# Altium PCB PCB1.PcbDoc
Units mm, origin at the board's own origin, x right, y up, seen from the top; angles counter-clockwise.
Board outline 117.4 x 100.2 mm, 2 copper layers (Top Layer, Bottom Layer); 124 components, 85 nets, 358 pads, 79 vias.
Unrouted connection lines stored in the file: 1.
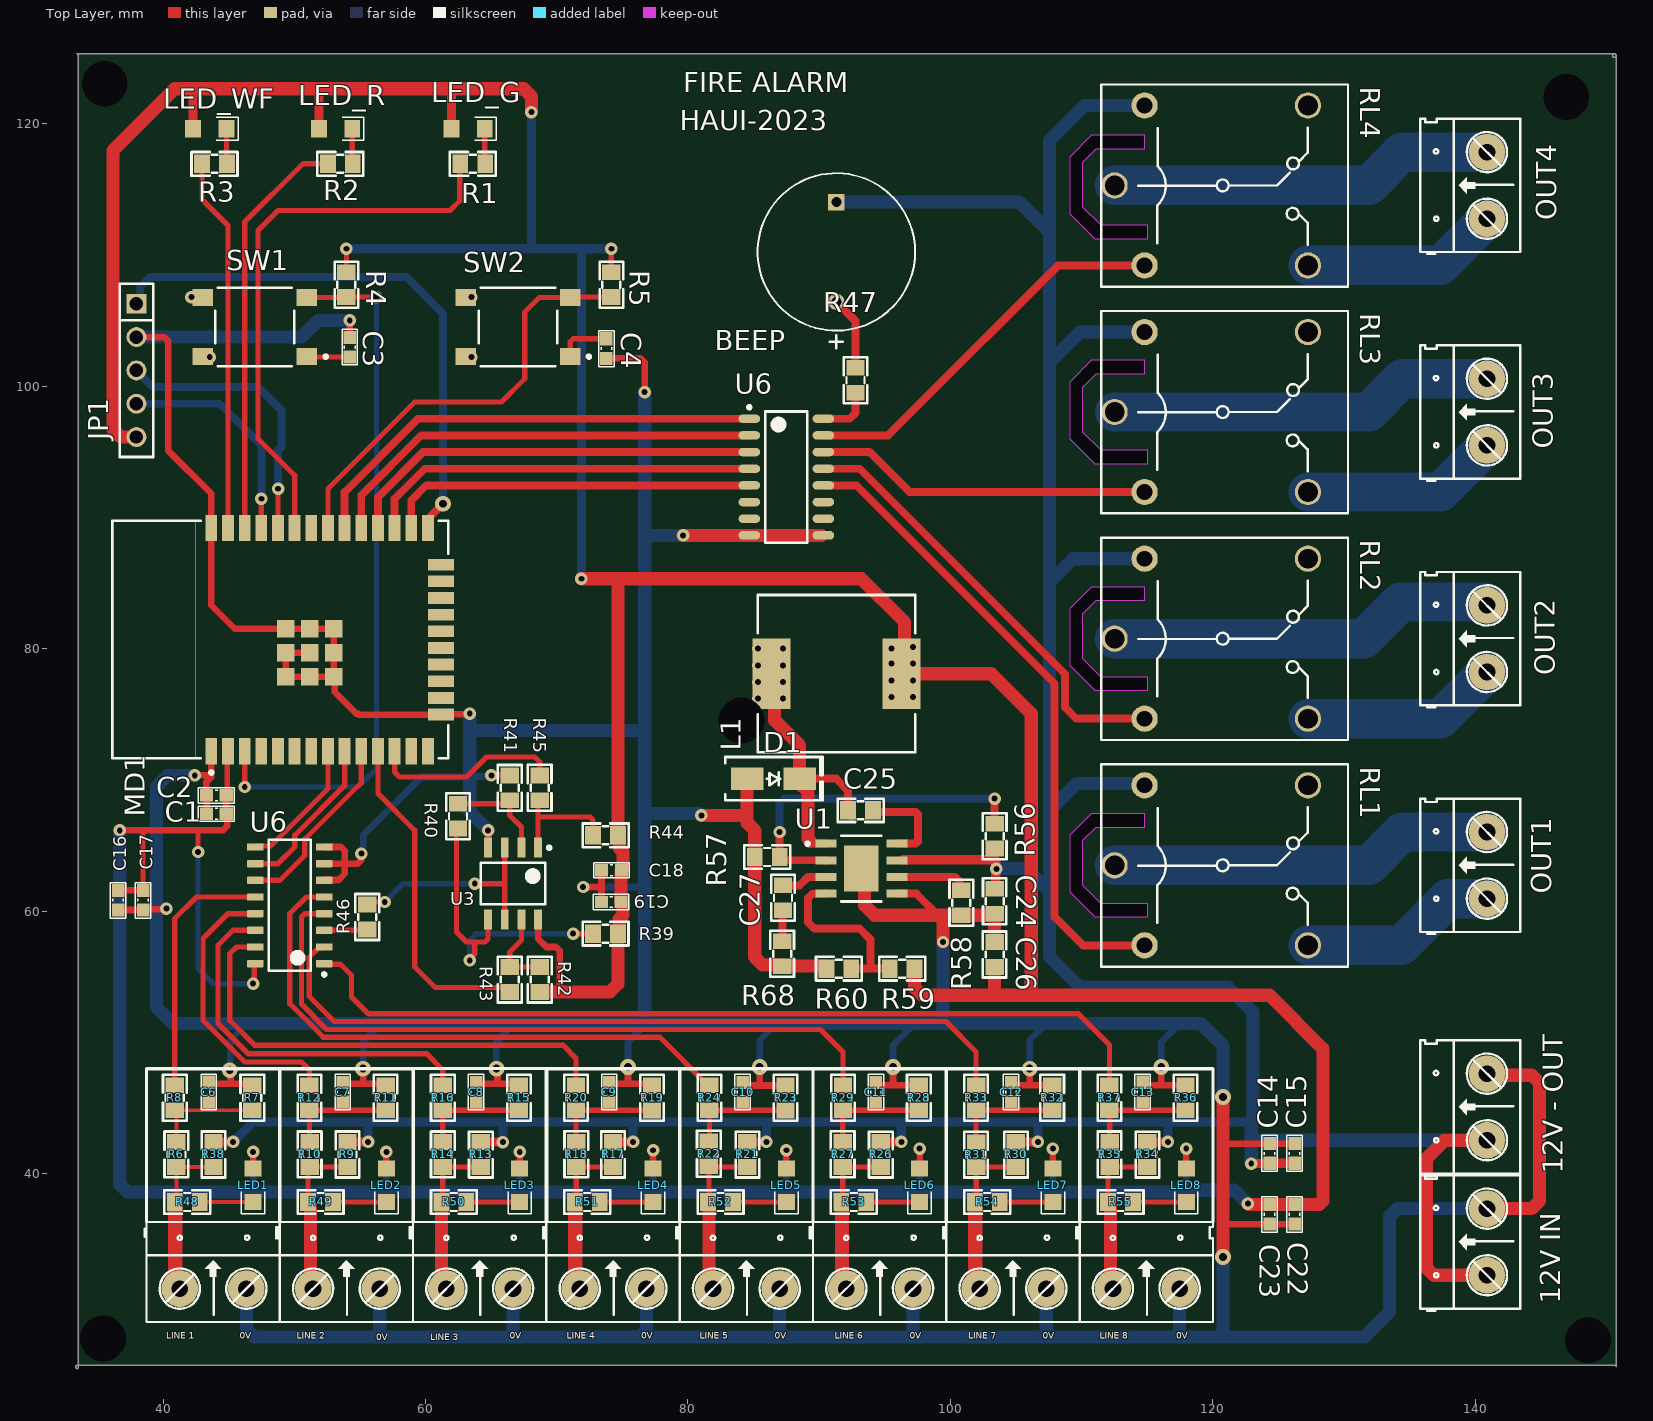
[diagram p0: Top Layer view]
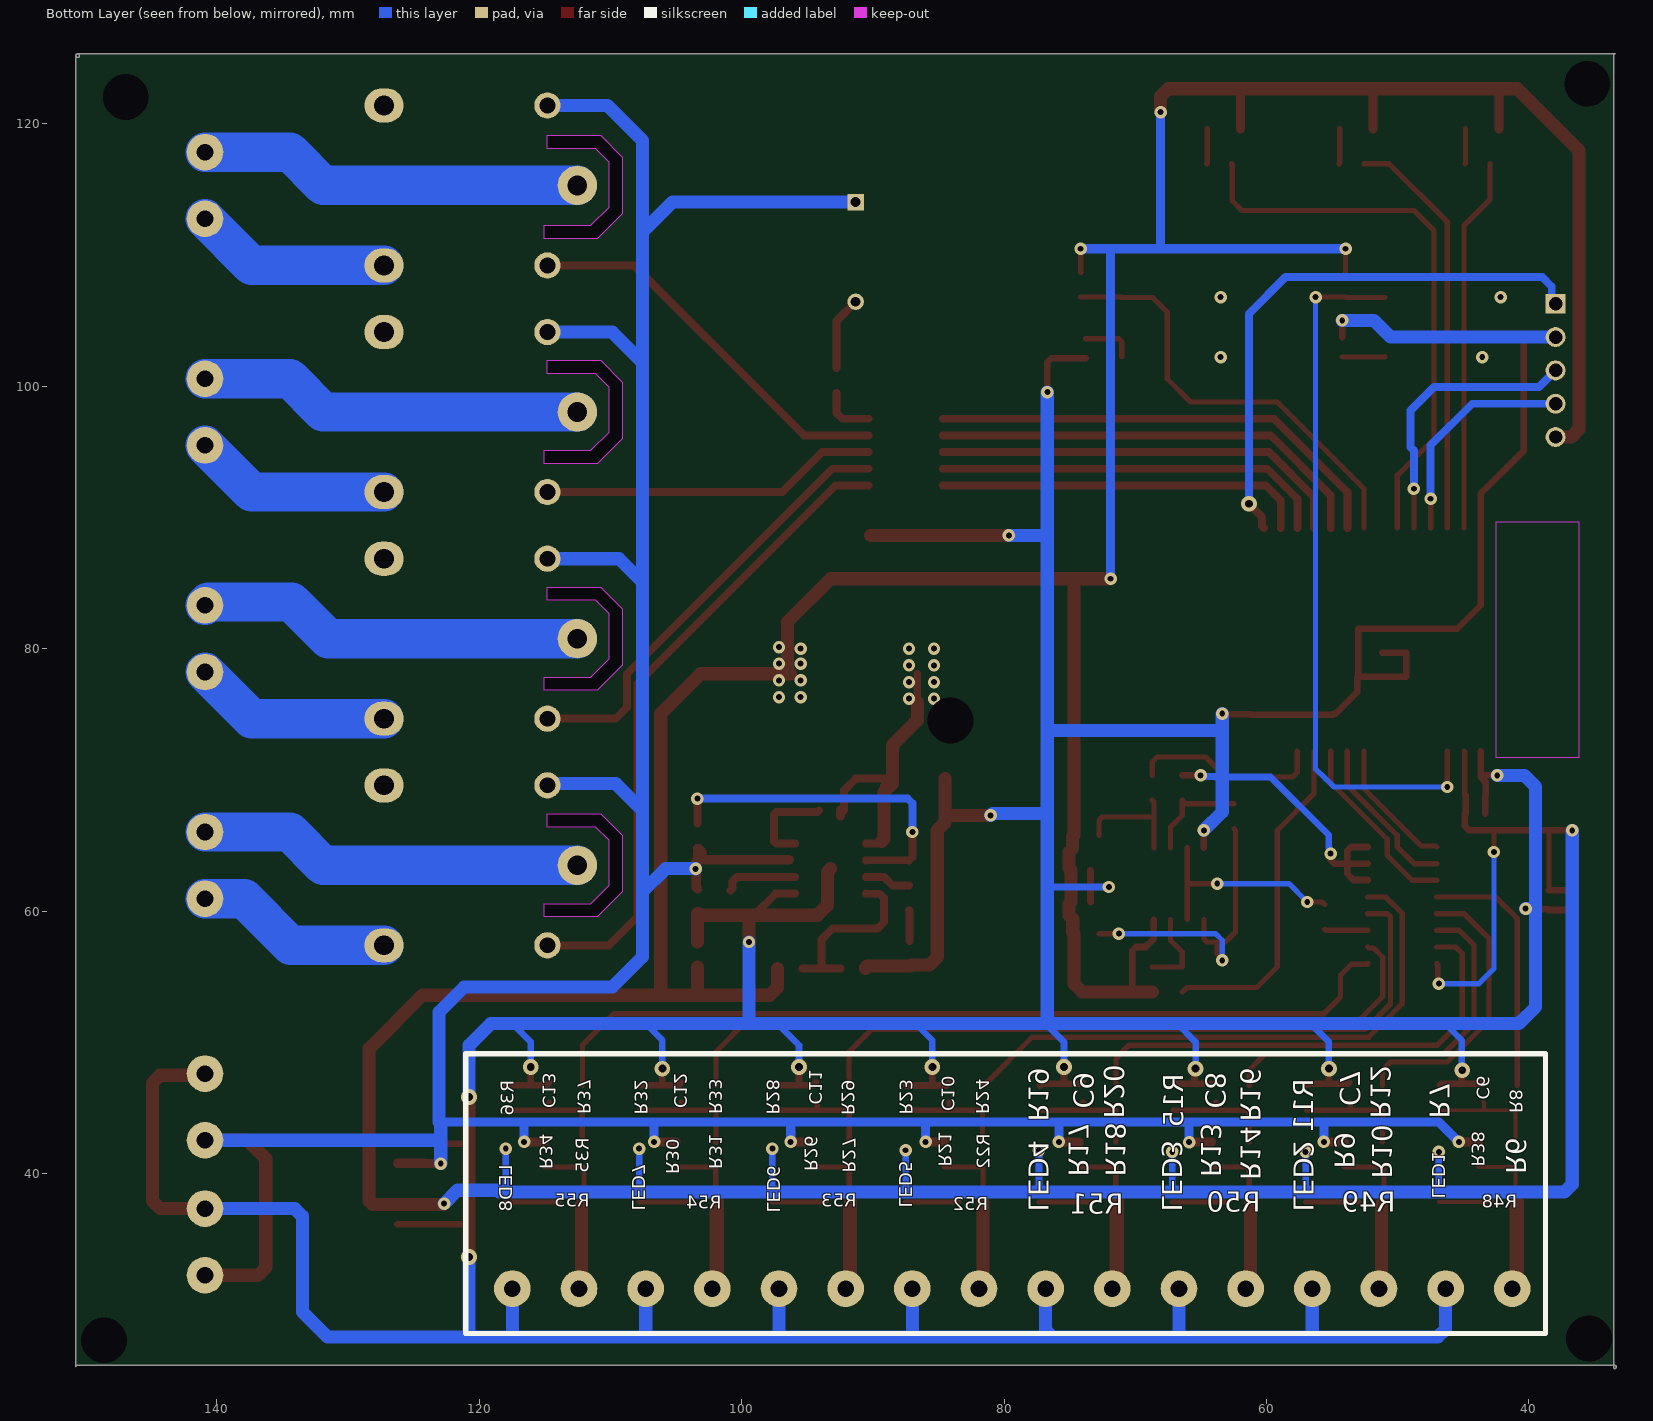
[diagram p1: Bottom Layer view, seen from below]
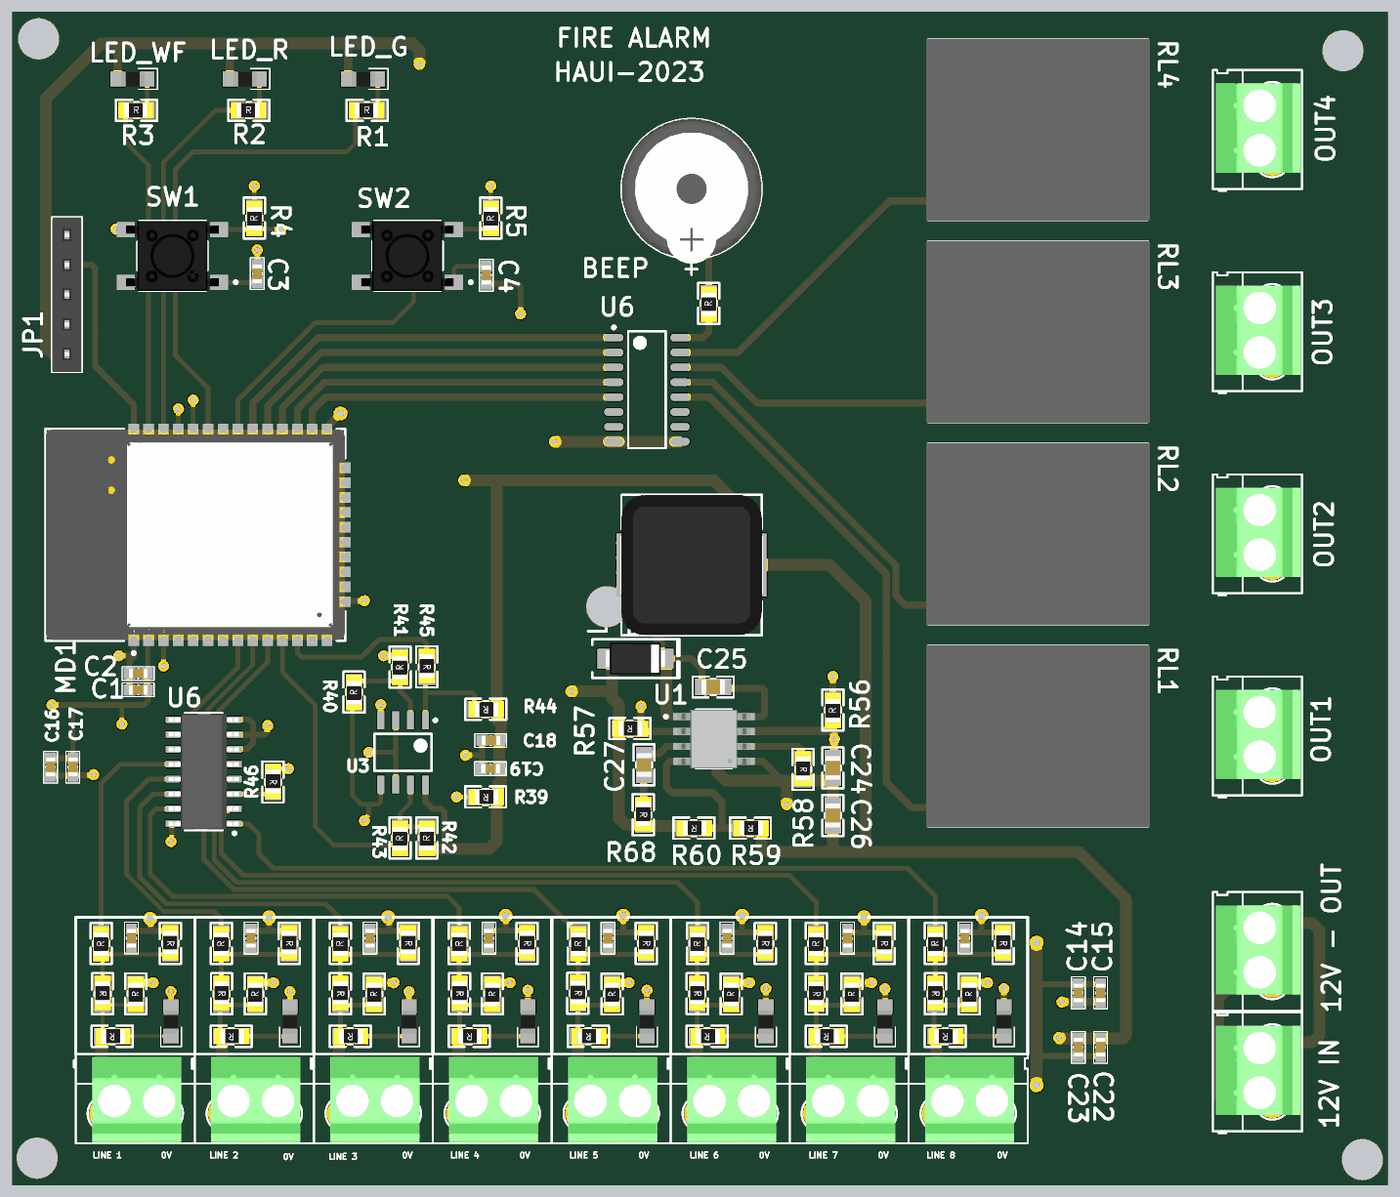
[diagram p2: 3D render of the assembled board from above, using the file's embedded part models]

## Layer stack, top to bottom
Top Solder: solder mask 0.0102, Solder Resist, Dk 3.5
Top Layer: signal copper 0.0356
Dielectric 1: dielectric 0.32, FR-4, Dk 4.8
Bottom Layer: signal copper 0.0356
Bottom Solder: solder mask 0.0102, Solder Resist, Dk 3.5

## Board outline
33.477,25.146 33.503,25.146 ccw(c33.401,25.222) 33.528,25.222 33.528,25.4 150.495,25.4 150.622,25.4 cw(c150.622,25.273) 150.749,25.273 150.749,125.222 cw(c150.622,125.222) 150.622,125.095 150.495,125.095 150.495,125.222 cw(c150.622,125.222) 150.622,125.349 cw(c150.622,125.222) 150.749,125.222 150.622,125.349 33.477,125.349 ccw(c33.477,125.222) 33.439,125.344 cw(c33.401,125.222) 33.528,125.222 33.528,125.095 33.528,25.4 33.477,25.4 ccw(c33.477,25.273)
cut-out: 114.808,119.126 110.744,119.126 109.093,117.475 109.093,113.157 110.998,111.252 115.062,111.252 115.062,112.268 111.506,112.268 110.109,113.665 110.109,117.094 111.125,118.11 114.808,118.11
cut-out: 114.808,101.981 110.744,101.981 109.093,100.33 109.093,96.012 110.998,94.107 115.062,94.107 115.062,95.123 111.506,95.123 110.109,96.52 110.109,99.949 111.125,100.965 114.808,100.965
cut-out: 114.808,84.709 110.744,84.709 109.093,83.058 109.093,78.74 110.998,76.835 115.062,76.835 115.062,77.851 111.506,77.851 110.109,79.248 110.109,82.677 111.125,83.693 114.808,83.693
cut-out: 114.808,67.437 110.744,67.437 109.093,65.786 109.093,61.468 110.998,59.563 115.062,59.563 115.062,60.579 111.506,60.579 110.109,61.976 110.109,65.405 111.125,66.421 114.808,66.421

## Design rules (kind name [scope] priority, off if disabled: settings)
BackDrilling [All] p1: maxstublength=0.381 usetopbackdrill=TRUE usebottombackdrill=TRUE holeoversize=0.025 holetolplus=0 holetolminus=0
Clearance [All] p1: gap=0.2 ignorepadtopadclearanceinfootprint=FALSE
HoleSize [All] p1: absolutevalues=TRUE maxlimit=2.54 minlimit=0.3 maxpercent=80.000 minpercent=20.000
PolygonConnect [All] p1: connectstyle=Relief reliefconductorwidth=0.254 reliefentries=4 polygonreliefangle="90 Angle" airgapwidth=0.254
RoutingVias [All] p1: holewidth=0.45 width=0.95 viastyle="Through Hole" minholewidth=0.45 minwidth=0.95 maxholewidth=0.6 maxwidth=1.2
SolderMaskExpansion [All] p1: expansion=0.102 istentingtop=FALSE
Width OUTPUT [InNetClass('OUTPUT')] p1: maxlimit=3 minlimit=1 preferedwidth=2
Width 12V [InNet('12V')] p2: maxlimit=1 minlimit=0.5 preferedwidth=0.7
Width 3.3V [InNet('3.3V')] p3: maxlimit=1 minlimit=0.254 preferedwidth=0.4
Width GND [InNet('GND')] p4: maxlimit=1 minlimit=0.254 preferedwidth=0.5
Width [All] p5: maxlimit=0.6 minlimit=0.3 preferedwidth=0.4
29 further rules are at their usual default settings.

## Classes and differential pairs
component class Power: C24 C25 C26 C27 D1 L1 R56 R57 R58 R59 R60 R68 U1
component class Connect_Input_output: C22 C23 LED1 LED2 LED3 LED4 LED5 LED6 LED7 LED8 "LINE 1" "LINE 2" "LINE 3" "LINE 4" "LINE 5" "LINE 6" "LINE 7" "LINE 8" R48 R49 R50 R51 R52 R53 R54 R55
component class Center: C1 C2 C3 C4 JP1 LED_G LED_R LED_WF MD1 R1 R2 R3 R4 R5 SW1 SW2
component class 16_Line_sensor: C6 C7 C8 C9 C10 C11 C12 C13 C14 C15 C16 C17 C18 C19 R6 R7 R8 R9 R10 R11 R12 R13 R14 R15 R16 R17 R18 R19 R20 R21 R22 R23 R24 R26 R27 R28 R29 R30 R31 R32 R33 R34 R35 R36 R37 R38 R39 R40 R41 R42 R43 R44 R45 R46 U3 U6
component class "4Line Output": "12V - OUT" "12V IN" BEEP OUT1 OUT2 OUT3 OUT4 R47 RL1 RL2 RL3 RL4 U6

## Components (designator, comment, footprint, x,y, rotation, side; value= is the part's Value field where it differs from the comment)
"12V - OUT" "CON 2 KF301" "Con 2 KF301 5.08" 140.9,42.545 r90 top
"12V IN" "CON 2 KF301" "Con 2 KF301 5.08" 140.9,32.258 r90 top
BEEP "MCKPX-G1203A-K4056" FP-MCKPX-G1203A-K4056-MFG 91.313,110.246 r270 top
C1 "104" "tu 0603" 44.069,67.437 r180 top
C2 "106" "tu 0603" 44.069,68.834 r180 top
C3 "104" "tu 0603" 54.229,102.985 r90 top
C4 "104" "tu 0603" 73.787,102.882 r270 top
C6 "104" "tu 0603" 43.481,46.216 r90 top
C7 "104" "tu 0603" 53.694,46.209 r90 top
C8 "104" "tu 0603" 63.854,46.209 r90 top
C9 "104" "tu 0603" 74.006,46.204 r90 top
C10 "104" "tu 0603" 84.174,46.204 r90 top
C11 "104" "tu 0603" 94.334,46.209 r90 top
C12 "104" "tu 0603" 104.633,46.209 r90 top
C13 "104" "tu 0603" 114.656,46.216 r90 top
C14 "104" "tu 0603" 124.333,41.541 r90 top
C15 "106" "tu 0603" 126.238,41.541 r90 top
C16 "104" "tu 0603" 36.576,60.845 r270 top
C17 "106" "tu 0603" 38.481,60.845 r270 top
C18 "104" "tu 0603" 74.18,63.119 r180 top
C19 "106" "tu 0603" 74.156,60.706 r180 top
C22 "104" "tu 0603" 126.238,36.908 r270 top
C23 "106" "tu 0603" 124.333,36.908 r270 top
C24 "106" "tu 0805" 103.381,60.771 r270 top
C25 "104" "tu 0805" 93.161,67.688 r180 top
C26 "226" "tu 0805" 103.375,56.704 r90 top
C27 "221" "tu 0805" 87.252,61.03 r270 top
D1 "SS34" "DIODE SMA" 86.519,70.104 r0 top
JP1 "code" "JP 1x5 CT" 37.973,106.299 r270 top
L1 "10uH" SUMI-CDRH127_V 91.316,78.105 r90 top
LED1 "LED" LED-0805 46.863,39.116 r270 top value="LED 3 ly Single Colour"
LED2 "LED" LED-0805 57.023,39.116 r270 top value="LED 3 ly Single Colour"
LED3 "LED" LED-0805 67.183,39.116 r270 top value="LED 3 ly Single Colour"
LED4 "LED" LED-0805 77.343,39.116 r270 top value="LED 3 ly Single Colour"
LED5 "LED" LED-0805 87.503,39.116 r270 top value="LED 3 ly Single Colour"
LED6 "LED" LED-0805 97.663,39.116 r270 top value="LED 3 ly Single Colour"
LED7 "LED" LED-0805 107.823,39.116 r270 top value="LED 3 ly Single Colour"
LED8 "LED" LED-0805 117.983,39.116 r270 top value="LED 3 ly Single Colour"
LED_G "LED_G" LED-0805 63.246,119.634 r0 top value="LED 3 ly Single Colour"
LED_R "LED" LED-0805 53.149,119.634 r0 top value="LED 3 ly Single Colour"
LED_WF "LED" LED-0805 43.561,119.634 r0 top value="LED 3 ly Single Colour"
"LINE 1" "CON 2 KF301" "Con 2 KF301 5.08" 41.275,31.242 r0 top
"LINE 2" "CON 2 KF301" "Con 2 KF301 5.08" 51.435,31.242 r0 top
"LINE 3" "CON 2 KF301" "Con 2 KF301 5.08" 61.595,31.242 r0 top
"LINE 4" "CON 2 KF301" "Con 2 KF301 5.08" 71.755,31.242 r0 top
"LINE 5" "CON 2 KF301" "Con 2 KF301 5.08" 81.915,31.242 r0 top
"LINE 6" "CON 2 KF301" "Con 2 KF301 5.08" 92.075,31.242 r0 top
"LINE 7" "CON 2 KF301" "Con 2 KF301 5.08" 102.235,31.242 r0 top
"LINE 8" "CON 2 KF301" "Con 2 KF301 5.08" 112.395,31.242 r0 top
MD1 "ESP32-WROOM-32" FP-ESP32-WROOM-32-MFG 48.941,80.699 r90 top
OUT1 "CON 2 KF301" "Con 2 KF301 5.08" 140.9,60.96 r90 top
OUT2 "CON 2 KF301" "Con 2 KF301 5.08" 140.9,78.232 r90 top
OUT3 "CON 2 KF301" "Con 2 KF301 5.08" 140.9,95.504 r90 top
OUT4 "CON 2 KF301" "Con 2 KF301 5.08" 140.9,112.776 r90 top
R1 "220" "tro smd 0805" 63.606,117.028 r0 top
R2 "220" "tro smd 0805" 53.509,117.028 r0 top
R3 "220" "tro smd 0805" 43.921,117.028 r0 top
R4 "1R" "tro smd 0805" 53.914,107.753 r90 top
R5 "1R" "tro smd 0805" 74.107,107.753 r90 top
R6 "100K" "tro smd 0805" 41.082,41.467 r270 top
R7 "33K" "tro smd 0805" 46.865,45.782 r270 top
R8 "10K" "tro smd 0805" 40.833,45.782 r90 top
R9 "1K" "tro smd 0805" 53.997,41.464 r90 top
R10 "100K" "tro smd 0805" 51.242,41.467 r270 top
R11 "33K" "tro smd 0805" 57.025,45.782 r270 top
R12 "10K" "tro smd 0805" 51.097,45.782 r90 top
R13 "1K" "tro smd 0805" 64.157,41.459 r90 top
R14 "100K" "tro smd 0805" 61.384,41.467 r270 top
R15 "33K" "tro smd 0805" 67.185,45.782 r270 top
R16 "10K" "tro smd 0805" 61.257,45.782 r90 top
R17 "1K" "tro smd 0805" 74.234,41.464 r90 top
R18 "100K" "tro smd 0805" 71.562,41.472 r270 top
R19 "33K" "tro smd 0805" 77.328,45.777 r270 top
R20 "10K" "tro smd 0805" 71.417,45.777 r90 top
R21 "1K" "tro smd 0805" 84.477,41.459 r90 top
R22 "100K" "tro smd 0805" 81.661,41.529 r270 top
R23 "33K" "tro smd 0805" 87.505,45.777 r270 top
R24 "10K" "tro smd 0805" 81.577,45.777 r90 top
R26 "1K" "tro smd 0805" 94.637,41.459 r90 top
R27 "100K" "tro smd 0805" 91.864,41.472 r270 top
R28 "33K" "tro smd 0805" 97.665,45.782 r270 top
R29 "10K" "tro smd 0805" 91.76,45.782 r90 top
R30 "1K" "tro smd 0805" 104.936,41.459 r90 top
R31 "100K" "tro smd 0805" 102.029,41.459 r270 top
R32 "33K" "tro smd 0805" 107.825,45.782 r270 top
R33 "10K" "tro smd 0805" 101.902,45.782 r90 top
R34 "1K" "tro smd 0805" 114.96,41.459 r90 top
R35 "100K" "tro smd 0805" 112.202,41.467 r270 top
R36 "33K" "tro smd 0805" 117.985,45.788 r270 top
R37 "10K" "tro smd 0805" 112.062,45.788 r90 top
R38 "1K" "tro smd 0805" 43.785,41.464 r90 top
R39 "1k" "tro smd 0805" 73.725,58.232 r180 top
R40 "2.2k" "tro smd 0805" 62.423,67.245 r90 top
R41 "2.2k" "tro smd 0805" 66.36,69.399 r90 top
R42 "4.7k" "tro smd 0805" 68.646,54.794 r90 top
R43 "1k" "tro smd 0805" 66.36,54.794 r90 top
R44 "4.7k" "tro smd 0805" 73.73,65.725 r180 top
R45 "1k" "tro smd 0805" 68.768,69.407 r270 top
R46 "1k" "tro smd 0805" 55.626,59.563 r270 top
R47 "2.2k" "tro smd 0805" 92.71,100.457 r90 top
R48 "2.2k" "tro smd 0805" 41.848,37.785 r180 top
R49 "2.2k" "tro smd 0805" 52.008,37.785 r180 top
R50 "2.2k" "tro smd 0805" 62.168,37.785 r180 top
R51 "2.2k" "tro smd 0805" 72.328,37.785 r180 top
R52 "2.2k" "tro smd 0805" 82.488,37.785 r180 top
R53 "2.2k" "tro smd 0805" 92.648,37.785 r180 top
R54 "2.2k" "tro smd 0805" 102.813,37.785 r180 top
R55 "2.2k" "tro smd 0805" 112.973,37.785 r180 top
R56 "100k" "tro smd 0805" 103.317,65.721 r90 top
R57 "24.9k" "tro smd 0805" 86.049,64.074 r180 top
R58 "200k" "tro smd 0805" 100.899,60.649 r270 top
R59 "124k" "tro smd 0805" 96.331,55.565 r180 top
R60 "40.2k" "tro smd 0805" 91.51,55.565 r180 top
R68 "68.1k" "tro smd 0805" 87.249,56.769 r270 top
RL1 "Relay" RL_SPDT_10A 112.522,63.5 r0 top value="Relay SPDT, 10A, 12V"
RL2 "Relay" RL_SPDT_10A 112.522,80.772 r0 top value="Relay SPDT, 10A, 12V"
RL3 "Relay" RL_SPDT_10A 112.522,98.044 r0 top value="Relay SPDT, 10A, 12V"
RL4 "Relay" RL_SPDT_10A 112.522,115.316 r0 top value="Relay SPDT, 10A, 12V"
SW1 "PTS645SM43SMTR92LFS" FP-PTS645SM43SMTR92LFS-MFG 46.99,104.521 r180 top
SW2 "PTS645SM43SMTR92LFS" FP-PTS645SM43SMTR92LFS-MFG 67.056,104.521 r180 top
U1 "MP1584EN-LF-Z" FP-MP1584EN-LF-Z-MFG 93.218,63.246 r0 top
U3 "LM393DR2G" ONSC-SOIC-8-751-07_V 66.675,62.103 r270 top
U6 "CD4051BM96" D0016A_L 49.657,60.452 r180 top
U6 "ULN2003D1013TR" STM-SO-16_M 87.503,93.091 r0 top

## Footprints (in the part's own frame and the unit in brackets; to place one, negate y for a bottom-side part, rotate by r counter-clockwise, add the part's x,y. Pads: shape width x height; smd on the part's side, far side on the other; paste and mask are expansions set on the pad)
"Con 2 KF301 5.08" [mil]
  round 110 hole 50: 1(0,0) 2(200,0)
  silkscreen extent -106,-100 300,200, body extent -45,-97 255,190, height 335
D0016A_L [mm] "SOIC, 16-Leads, Body 10x4mm, Pitch 1.27mm, IPC High Density"
  rrect18% 1.25x0.55 smd: 1(-2.625,4.445) 2(-2.625,3.175) 3(-2.625,1.905) 4(-2.625,0.635) 5(-2.625,-0.635) 6(-2.625,-1.905) 7(-2.625,-3.175) 8(-2.625,-4.445) 9(2.625,-4.445) 10(2.625,-3.175) 11(2.625,-1.905) 12(2.625,-0.635) 13(2.625,0.635) 14(2.625,1.905) 15(2.625,3.175) 16(2.625,4.445)
  silkscreen extent -2.75,-5 1.6,5.39, body extent -3,-4.95 3,4.95, height 1.59
"DIODE SMA" [mm] "SMA"
  rect 2.5x1.7 smd: 1(-2,0) 2(2,0)
  silkscreen extent -3.68,-1.65 3.75,1.65, body extent -2.6,-1.37 2.6,1.37, height 2.4
FP-ESP32-WROOM-32-MFG [mm]
  rect 2x0.9 smd paste+0 mask+0: 1(-8.5,5.26) 2(-8.5,3.99) 3(-8.5,2.72) 4(-8.5,1.45) 5(-8.5,0.18) 6(-8.5,-1.09) 7(-8.5,-2.36) 8(-8.5,-3.63) 9(-8.5,-4.9) 10(-8.5,-6.17) 11(-8.5,-7.44) 12(-8.5,-8.71) 13(-8.5,-9.98) 14(-8.5,-11.25) 25(8.5,-11.25) 26(8.5,-9.98) 27(8.5,-8.71) 28(8.5,-7.44) 29(8.5,-6.17) 30(8.5,-4.9) 31(8.5,-3.63) 32(8.5,-2.36) 33(8.5,-1.09) 34(8.5,0.18) 35(8.5,1.45) 36(8.5,2.72) 37(8.5,3.99) 38(8.5,5.26)
  rect 0.9x2 smd paste+0 mask+0: 15(-5.715,-12.25) 16(-4.445,-12.25) 17(-3.175,-12.25) 18(-1.905,-12.25) 19(-0.635,-12.25) 20(0.635,-12.25) 21(1.905,-12.25) 22(3.175,-12.25) 23(4.445,-12.25) 24(5.715,-12.25)
  rect 1.33x1.33 smd paste+0 mask+0: 39(-2.835,-2.24) 39(-2.835,-0.405) 39(-2.835,-4.075) 39(-1,-0.405) 39(-1,-4.075) 39(-1,-2.24) 39(0.835,-0.405) 39(0.835,-4.075) 39(0.835,-2.24)
  Keep-Out Layer region: -9,6.45 9,6.45 9,12.75 -9,12.75
  Keep-Out Layer region: -9,6.45 9,6.45 9,12.75 -9,12.75
  silkscreen extent -10.25,-12.8 9.05,12.8, body extent -9.6,-13.35 9.6,12.9, height 0.25
FP-MCKPX-G1203A-K4056-MFG [mm]
  rect 1.25x1.25 hole 0.75 paste-1000 mask+0: 1(-3.8,0)
  round 1.25 hole 0.75 paste-1000 mask+0: 2(3.8,0)
  silkscreen extent -6,-6 7.35,6, body extent -6.1,-6.1 6.1,6.1, height 0.25
FP-MP1584EN-LF-Z-MFG [mm]
  rect 1.6x0.61 smd paste+0 mask+0: 1(-2.7,1.905) 2(-2.7,0.635) 3(-2.7,-0.635) 4(-2.7,-1.905) 5(2.7,-1.905) 6(2.7,-0.635) 7(2.7,0.635) 8(2.7,1.905)
  rect 2.62x3.51 smd paste+0 mask+0: 9(0,0)
  silkscreen extent -4.22,-2.5 1.53,2.5, body extent -3.6,-2.6 3.6,2.6, height 0.25
FP-PTS645SM43SMTR92LFS-MFG [mm]
  rect 1.55x1.3 smd paste+0 mask+0: 1(-3.975,2.25) 2(3.975,2.25) 3(-3.975,-2.25) 4(3.975,-2.25)
  silkscreen extent -5.53,-3 3,3, body extent -4.85,-3.1 4.85,3.1, height 0.25
"JP 1x5 CT" [mm]
  rect 1.52x1.52 hole 1.02: 1(0,0)
  round 1.52 hole 1.02: 2(2.54,0) 3(5.08,0) 4(7.62,0) 5(10.16,0)
  silkscreen extent -1.52,-1.27 11.68,1.27, body extent -1.52,-1.25 11.68,1.25, height 8.51
LED-0805 [mm] "Resistor SMD 80x50mil"
  rect 1.2x1.3 smd: 1(-1.27,0) 2(1.27,0)
  silkscreen extent 0.5,-0.89 2.16,0.89, body extent -0.97,-0.64 1.03,0.62, height 0.58
ONSC-SOIC-8-751-07_V [mm] "SOIC, 8-Leads, Body 4.9x3.9mm, Pitch 1.27mm"
  rect 1.52x0.6 smd: 1(-2.74,1.905) 2(-2.74,0.635) 3(-2.74,-0.635) 4(-2.74,-1.905) 5(2.74,-1.905) 6(2.74,-0.635) 7(2.74,0.635) 8(2.74,1.905)
  silkscreen extent -2.86,-2.45 1.58,2.88, body extent -1.95,-2.45 1.95,2.45, height 1.75
RL_SPDT_10A [mm] "Relay SPDT, 5 pin, 10A,W 650mil, L 800mil, H 800mil"
  round 2 / inner round 3 / far side round 3 hole 1.5: 1(0,0)
  round 2 / inner round 3 / far side oval 3x2.6 hole 1.5: 2(14.732,6.096) 3(14.732,-6.096)
  round 2 hole 1.2: 4(2.286,-6.096) 5(2.286,6.096)
  silkscreen extent -1.02,-7.72 17.78,7.7, body extent -1.17,-7.78 17.93,7.72, height 15.2
STM-SO-16_M [mm] "SOIC, 16-Leads, Body 10x4mm, Pitch 1.27mm, IPC Low Density"
  oval 1.65x0.65 smd: 1(-2.825,4.445) 2(-2.825,3.175) 3(-2.825,1.905) 4(-2.825,0.635) 5(-2.825,-0.635) 6(-2.825,-1.905) 7(-2.825,-3.175) 8(-2.825,-4.445) 9(2.825,-4.445) 10(2.825,-3.175) 11(2.825,-1.905) 12(2.825,-0.635) 13(2.825,0.635) 14(2.825,1.905) 15(2.825,3.175) 16(2.825,4.445)
  silkscreen extent -2.95,-5 1.6,5.44, body extent -2,-5 2,5, height 1.75
SUMI-CDRH127_V [mm] "SMD, 2-Leads, Body 12x12mm"
  rect 5.4x2.9 smd: 1(0,4.95) 2(0,-4.95)
  silkscreen extent -6,-6 6,6, body extent -6,-6.1 6,6.1, height 8.4
"tro smd 0805" [mm]
  rect 1.2x1.4 smd: 1(-0.946,-0.061) 2(0.954,-0.061)
  silkscreen extent -1.75,-0.97 1.75,0.84, body extent -1.56,-0.76 1.44,0.64, height 0.53
"tu 0603" [mm] "Chip Capacitor, 2-Leads, Body 1,60x0,80mm, IPC Medium Density"
  rect 1x0.95 smd mask+0.076: 1(-0.75,0) 2(0.75,0)
  silkscreen extent -1.35,-0.58 1.37,0.58, body extent -0.8,-0.4 0.8,0.4, height 0.9
"tu 0805" [mm] "Compoment SMD 80x50mil"
  rect 1.2x1.4 smd: 1(-0.946,-0.003) 2(0.954,-0.003)
  silkscreen extent -1.75,-0.89 1.75,0.89, body extent -1.01,-0.64 1.01,0.63, height 0.61

## Part data
"12V - OUT" "12V IN" "LINE 1" "LINE 2" "LINE 3" "LINE 4" "LINE 5" "LINE 6" "LINE 7" "LINE 8" OUT1 OUT2 OUT3 OUT4: "Cắm", Chung_Loai=Cắm, Don_Vi=Con, Ma_Hang=MH000987, Ten_Linh_Kien="CON 2 KF301-2P 5.08MM Xanh Dương"
BEEP: library part CMP-12433-000001-1, "MAGNETIC BUZZER AND TRANSDUCER - More Details", Current=30mA, Frequency=2300Hz, Manufacturer="Multicomp Pro", Max Supply Voltage=5V, Min Supply Voltage=2V, Operating Supply Voltage=3V, Package=0, Temperature="-20°C to +70°C", Temperature Range High=+70°C, Temperature Range Low=-20°C, Automotive=No, Category=Speak, ComponentLink2Description=Datasheet, ComponentLink2URL=http://www.farnell.com/datasheets/1498149.pdf?_ga=2.17855225.1157923166.1572356775-536200964.1569240579, Device Class L1=Electromechanical, Device Class L2="Audio Products", Device Class L3=Buzzers, Height=9.5mm, Lead Free=Yes, Manufacturer Part Number=MCKPX-G1203A-K4056, Octopart=https://octopart.com/mckpx-g1203a-k4056-multicomp-12157154, RoHS=TRUE, Standoff Height=0.5mm
C1 C3 C4 C6 C7 C8 C9 C10 C11 C12 C13 C14 C16 C18 C22: library part "Tu 0603 104 50V 10%", "Dán", Chung_Loai=Dán, Don_Vi=Con, Ma_Hang=MH004568, So_Chan=2, Ten_Linh_Kien="Tụ 0603 104-100nF 10% 50V"
C2 C15 C17 C19 C23: library part "Tu 0603 106 16V 20%", "Dán", Chung_Loai=Dán, Don_Vi=Con, Ma_Hang=MH004848, So_Chan=2, Ten_Linh_Kien="Tụ 0603-10uF 20% 16V"
C24: library part "Tu 0805 106 16V 10%", "Dán", Chung_Loai=Dán, Don_Vi=Con, Ma_Hang=MH004553, So_Chan=2, Ten_Linh_Kien="Tụ 0805 106-10uF 10% 16V"
C25 C26: library part "Tu 0805 104 50V 10%", "Dán", Chung_Loai=Dán, Don_Vi=Con, Ma_Hang=MH004551, So_Chan=2, Ten_Linh_Kien="Tụ 0805 104-100nF 10% 50V"
C27: library part "Tu 0805 222 50V 10%", "Dán", Chung_Loai=Dán, Don_Vi=Con, Ma_Hang=MH004557, So_Chan=2, Ten_Linh_Kien="Tụ 0805 222-2.2nF 10% 50V"
D1: library part "Diode SS34 ( 1N5822 )", "Dán", Chung_Loai=Dán, Don_Vi=Con, Ma_Hang=MH002104, Ten_Linh_Kien="Diode SS34 3A 40V SMA ( 1N5822 SS34A)"
JP1: library part "JP 1x5 2.54 Cai Thang", "Cắm", Chung_Loai=Cắm, Don_Vi=Con, Ma_Hang=MH004006, Ten_Linh_Kien="Jump Đơn Cái 2.54MM 1x20P Thẳng"
L1: library part CMP-2000-06084-1, "Power Inductor, 10 uH, +/- 20%, -40 to 100 degC, 2-Pin SMD, RoHS, Tape and Reel", Current - Saturation=-, Current Rating=5.4A, DC Resistance (DCR)=21.6mOhmMax, Frequency - Test=1kHz, Inductance=10µH, Manufacturer=Sumida, Operating Temperature=-40°C~100°C, Package / Case=Nonstandard, Package Description="2-Pin Surface Mount Device, Body 12 x 12 mm", Package Reference=CDRH127, Standard Package=1, Tolerance=±20%, Catalog Drawings=CDRH127SeriesFrontCDRH127SeriesSideCDRH127SeriesBottom, Category=Inductors,Coils,Chokes, Datasheet URL=http://products.sumida.com/products/pdf/CDRH127.pdf, Datasheet Version=01/2014, Family=FixedInductors, Frequency - Self Resonant=-, Height - Seated (Max)="0.315\"(8.00mm)", Manufacturer URL=http://www.sumida.com/, Material - Core=-, Mounting Technology=SurfaceMount, Mounting Type=SurfaceMount, Online Catalog=CDRHSeries, Other Names=308-1457-1, Packaging=CutTape(CT), Product Training Modules=PowerInductorBasics, Q @ Freq=-, Ratings=-, Series=CDRH127, Shielding=Shielded, Size / Dimension="0.472\"Lx0.472\"W(12.00mmx12.00mm)", Type=-
LED1 LED2 LED3 LED4 LED5 LED6 LED7 LED8 LED_R LED_WF: "LED Single colour Green and Red"
LED_G: library part LED, "LED Single colour Green and Red"
MD1: library part CMP-194065-000008-1, "RX TXRX MOD WIFI SURFACE MOUNT", Case/Package=SMD/SMT, Frequency=2.5GHz, Max Operating Temperature=85°C, Min Operating Temperature=-40°C, Operating Supply Voltage=3.6V, Package Quantity=550, Data Rate=150Mbps, Mount="Surface Mount", Packaging="Cut Tape", Sensitivity=-98dBm, Weight=0.088185oz
R1 R2 R3 R4 R5: library part "Tro 0805 1% 1R", "Dán", Chung_Loai=Dán, Don_Vi=Con, Ma_Hang=MH004177, So_Chan=2, Ten_Linh_Kien="Trở 0805 1% 1R"
R6 R7 R8 R9 R10 R11 R12 R13 R14 R15 R16 R17 R18 R19 R20 R21 R22 R23 R24 R26 R27 R28 R29 R30 R31 R32 R33 R34 R35 R36 R37 R38 R39 R40 R41 R42 R43 R44 R45 R46 R47 R48 R49 R50 R51 R52 R53 R54 R55 R56 R57 R58 R59 R60 R68: library part "Tro 0805 1% 2k", "Dán", Chung_Loai=Dán, Don_Vi=Con, Ma_Hang=MH005471, So_Chan=2, Ten_Linh_Kien="Trở 0805 1% 2k"
RL1 RL2 RL3 RL4: library part "Relay 1", "Relay SPDT 5 Pin"
SW1 SW2: library part CMP-2000-05160-2, "SWITCH TACTILE SPST-NO 0.05A 12V", Case/Package=SMD/SMT, Color=Black, Contact Resistance=100mR, Current Rating=50mA, Max Operating Temperature=60°C, Max Voltage Rating (DC)=12V, Min Operating Temperature=-20°C, Operating Force=160gf, Package Quantity=1, Actuator Length=0.85mm, Actuator Material=Nylon, Actuator Type=Standard, Contact Material=Silver, Contact Plating=Silver, Depth=9mm, Illumination Type=Non-Illuminated, Lead Free="Lead Free", Length=6mm, Max Current Rating=50mA, Mechanical Life=100000Cycles, Mount="Surface Mount", Orientation=Straight, Packaging="Tape and Reel", REACH SVHC="No SVHC", Switch Function=Off-Mom, Termination="Gull Wing", Throw Configuration=SPST, Voltage Rating (DC)=12V
U1: library part CMP-57379-000006-1, "IC REG BUCK ADJ 3A", Ambient Temperature Range High=+85°C, Ambient Temperature Range Low=-20°C, Manufacturer="Monolithic Power Systems", Max Junction Temp=+125°C, Max Power Dissipation=2.5W, Max Supply Voltage=28V, Min Supply Voltage=4.5V, Nominal Supply Current=100uA, Output Current=3A, Output Voltage=0.8-25V, Switching Frequency=100-1500kHz, Temperature="-20°C to +125°C", Automotive=No, Category=IC, ComponentLink2Description=Datasheet, ComponentLink2URL=https://www.monolithicpower.com/en/documentview/productdocument/index/doc_url/L01QMTU4NF9yMS4wLnBkZg%3D%3D/release_date/MjAwOS0wNC0wOSAwMDowMDowMA%3D%3D/, Device Class L1="Integrated Circuits (ICs)", Device Class L2="Power Management ICs", Device Class L3="Voltage Regulators - Switching", Digikey Description="IC REG BUCK ADJ 3A", Height=1.7mm, Ipc Land Pattern Name=SOIC127P600X150-8, Lead Free=Yes, Manufacturer Part Number=MP1584EN-LF-Z, Number Of Outputs=1, Octopart=https://octopart.com/mp1584en-lf-z-monolithic+power+systems-18629680, Output Type=AdjustableProgrammable, Package=MP1584EN-LF-Z, RoHS=TRUE, Standoff Height=0mm, Switching Topology=Buck, Temperature Range High=+125°C, Temperature Range Low=-20°C
U3: library part CMP-1305-00048-1, "Low Offset Voltage Dual Comparators, 2 to 36 V, 0 to 70 degC, 8-Pin SOIC, Pb-Free, Tape and Reel", Manufacturer="On Semiconductor", ComponentLink1Description="Manufacturer URL", ComponentLink1URL=http://www.onsemi.com/, ComponentLink2Description=Datasheet, ComponentLink2URL=http://www.onsemi.com/pub_link/Collateral/LM393-D.PDF, ComponentLink3Description="Package Specification", ComponentLink3URL=http://www.onsemi.com/pub_link/Collateral/751-07.PDF, DatasheetVersion="Rev. 25", ICC Typ (mA)=0.4, IO Typ (mA)=16, Mounting Technology="Surface Mount", PackageDescription="8-Pin Small Outline Integrated Circuit, Body 4.9 x 3.9 mm, Pitch 1.27 mm", PackageReference=SOIC-8-751-07, PackageVersion="Rev. AK, 02/2011", Packing="Tape and Reel", PartNumber=LM393DR2G, RoHS=TRUE, VCC Max (V)=36, VCC Min (V)=2
U6: library part CMP-1575-00045-4, "CMOS Single 8-Channel Analog Multiplexer/Demultiplexer with Logic-Level Conversion, D0016A, LARGE T&R", Generic Part Number=CD4051B, Manufacturer="Texas Instruments", Operating Temperature Range(C)="-55 to 125", Rating=Military, Bandwidth(Max)(MHz)=20, Code_JEDEC="MS-012 variation AC", Configuration="1 X 1：8 MUX", Crosstalk=Yes, DatasheetVersion=SCHS047G, ICC(Typ)(mA)=0.00008, Output Drive (IOL/IOH)(Max)(mA)=1, Output Type=CMOS, PackageReference=D0016A, PackageVersion=http://www.ti.com/lit/ml/mpds178g/mpds178g.pdf, Ron(Max)(Ohms)=240, Ron(Typ)(Ohms)=125, VCC(Max)(V)=18, VCC(Min)(V)=5
U6: library part CMP-2000-05374-1, "Seven NPN Darlington Array Transistor, 50 V, 500 mA, -40 to 85 degC, 8-Pin SOIC, RoHS, Tape and Reel", Collector Emitter Voltage V(br)ceo=50V, DC Collector Current=500mA, DC Current Gain hFE=1000hFE, Manufacturer=STMicroelectronics, Operating Temperature Max=85degC, Package Description="16-Pin Small Outline Integrated Circuit, Body 9.9 x 3.9 mm, Pitch 1.27 mm", Package Reference=SO-16, Power Dissipation Pd=-, Transistor Case Style=SOIC, Automotive Qualification Standard=-, Datasheet URL=https://datasheet.ciiva.com/1193/1690348-1193460.pdf, Datasheet Version="Rev. 8, 06/2012", Manufacturer URL=http://www.st.com/, MSL=MSL1-Unlimited, No. of Pins=16Pins, Product Range=-, SVHC=NoSVHC(17-Dec-2015), Transistor Polarity=NPN

## Free pads (board coordinates)
  round 1.524 hole 3.5: 2(35.433,27.432) 2(35.56,123.063) 2(84.074,74.549) 2(146.939,122.047) 2(148.59,27.305)

## Via types
v1: diameter 0.95, hole 0.45, Top Layer to Bottom Layer, 68 vias
v2: diameter 1.2, hole 0.6, Top Layer to Bottom Layer, 11 vias

## Nets (pads, with @x,y where several pads share a name; then routed paths per layer and width w, separated by ;. In a path a pad name is that pad's centre, name@x,y a point inside that pad or via, vN(x,y) a via of type N, cw(c..) or ccw(c..) an arc to the next point about the centre after c; other vN are vias at no path point)
3.3V: C1.1 C2.1 C16.1 C17.1 C18.1 C19.1 C22.1 C23.1 C26.1 JP1.5 L1.2 LED1.1 LED2.1 LED3.1 LED4.1 LED5.1 LED6.1 LED7.1 LED8.1 LED_G.1 LED_R.1 LED_WF.1 MD1.2 R4.2 R5.2 R39.1 R42.1 R44.1 R59.1 U3.8 U6.16@47.032,56.007 | length 477.5
  Top Layer w0.4: C17.1 38.481,66.167 ; v1(42.672,64.516) 42.672,66.167 ; C2.1@44.885,68.9 44.885,72.133 MD1.2 ; v1(46.863,54.483) 46.948,54.568 46.948,55.932 47.023,56.007 U6.16@47.032,56.007 ; R4.2 v1(53.975,110.49) ; R5.2 v1(74.168,110.49)
  Top Layer w0.5: C16.1 C17.1 ; v1(36.703,66.167) 38.481,66.167 42.672,66.167 44.577,66.167 44.883,66.473 C1.1@44.883,67.437 ; C1.1 C2.1 ; LED1.1 v1(46.863,41.656) ; LED2.1 v1(57.023,41.656) ; LED3.1 v1(67.183,41.656) ; U3.8 68.58,57.912 69.215,57.277 69.938,57.277 70.231,56.984 70.231,54.244 70.157,54.17 ; C19.1@74.674,60.706 C18.1@74.674,63.119 ; LED4.1 v1(77.343,41.783) ; LED5.1 v1(87.503,41.783) ; LED6.1 v1(97.663,41.91) ; LED7.1 v1(107.823,41.91) ; LED8.1 v1(117.983,41.91)
  Top Layer w0.7: 42.164,122.682 42.291,122.555 LED_WF.1 ; 51.816,122.682 51.88,122.618 LED_R.1 ; 61.849,122.682 61.976,122.555 LED_G.1
  Top Layer w1: JP1.5 36.781,96.139 36.195,96.725 36.195,117.983 40.894,122.682 42.164,122.682 51.816,122.682 61.849,122.682 67.486,122.682 68.072,122.096 v1(68.072,120.904) ; R42.1 74.041,53.848 74.671,54.478 R39.1 74.771,58.393 74.771,59.404 75.057,59.69 75.057,60.555 C19.1 74.906,63.095 C18.1 75.057,63.246 75.057,64.516 74.776,64.797 74.776,65.686 R44.1 74.676,85.344 ; v1(71.882,85.344) 74.676,85.344 ; R59.1 97.277,54.18 97.863,53.594 103.505,53.594 ; C26.1 103.378,53.721 103.505,53.594 ; 106.172,53.98 106.172,75.057 103.124,78.105 L1.2 96.517,78.356 96.517,82.042 93.215,85.344 74.676,85.344 ; v1(122.682,37.719) 122.743,37.658 C23.1 C22.1 128.131,37.658 128.397,37.924 128.397,49.53 124.333,53.594 103.505,53.594
  Bottom Layer w0.4: v1(42.672,64.516) 42.672,55.626 43.815,54.483 v1(46.863,54.483)
  Bottom Layer w0.5: 46.863,38.608 v1(46.863,41.656) ; 57.023,38.608 v1(57.023,41.656) ; v1(67.183,41.656) 67.183,38.735 67.31,38.608 ; 77.343,38.608 v1(77.343,41.783) ; 87.503,38.608 v1(87.503,41.783) ; 97.663,38.608 v1(97.663,41.91) ; v1(107.823,41.91) 107.823,38.735 107.95,38.608 ; 117.856,38.608 117.983,38.735 v1(117.983,41.91)
  Bottom Layer w0.7: v1(53.975,110.49) 68.072,110.49 ; v1(68.072,120.904) 68.072,110.49 ; v1(71.882,85.344) 71.882,110.49 ; v1(74.168,110.49) 71.882,110.49 ; 68.072,110.49 71.882,110.49
  Bottom Layer w1: v1(36.703,66.167) 36.703,39.194 37.289,38.608 46.863,38.608 57.023,38.608 67.31,38.608 77.343,38.608 87.503,38.608 97.663,38.608 107.95,38.608 117.856,38.608 118.491,38.608 118.618,38.735 121.666,38.735 v1(122.682,37.719)
  other v1: 95.504,76.327 97.155,76.327 95.504,77.597 97.155,77.597 95.504,78.867 97.155,78.867 95.504,80.01 97.155,80.137
12V: "12V - OUT.1" "12V IN.1" BEEP.1 C14.1 C15.1 C24.1 R9.2 R13.2 R17.2 R21.2 R26.2 R30.2 R34.2 R38.2 R56.1 RL1.5 RL2.5 RL3.5 RL4.5 U1.7 | length 297.6
  Top Layer w0.7: R38.2 v1(45.339,42.418) ; R9.2 v1(55.626,42.418) ; R13.2 v1(65.908,42.413) ; R17.2 74.295,42.291 74.422,42.418 v1(75.819,42.418) ; R21.2 85.974,42.413 v1(85.979,42.418) ; R26.2 96.261,42.413 v1(96.266,42.418) ; U1.7@96.368,63.926 103.028,63.926 103.028,64.425 103.028,64.525 103.153,64.65 103.278,64.775 R56.1 ; C24.1 103.467,61.806 103.467,63.175 v1(103.514,63.222) 103.467,63.27 103.467,63.837 103.378,63.926 R56.1@103.378,64.425 ; R30.2 106.675,42.413 v1(106.68,42.418) ; R34.2 116.581,42.413 v1(116.586,42.418) ; v1(122.936,40.767) 122.948,40.779 124.208,40.779 124.22,40.791 C15.1
  Top Layer w1: 140.9,32.258 136.857,32.258 136.271,32.844 136.271,41.148 137.668,42.545 140.9,42.545
  Bottom Layer w0.7: v1(45.339,42.418) 46.863,43.942 55.626,43.942 ; v1(55.626,42.418) 55.626,43.942 ; v1(65.908,42.413) 65.908,43.82 65.786,43.942 ; v1(75.819,42.418) 75.819,43.942 ; v1(85.979,42.418) 85.979,43.815 85.852,43.942 ; v1(96.266,42.418) 96.266,43.942 ; v1(106.68,42.418) 106.68,43.815 106.553,43.942 ; RL1.5@114.681,69.723 RL1.5 ; v1(116.586,42.418) 116.586,43.942 ; 122.936,43.942 116.586,43.942 ; 55.626,43.942 65.786,43.942 ; 65.786,43.942 75.819,43.942 ; 75.819,43.942 85.852,43.942 ; 85.852,43.942 96.266,43.942 ; 96.266,43.942 106.553,43.942 ; 106.553,43.942 116.586,43.942
  Bottom Layer w1: BEEP.1 105.283,114.046 107.569,111.76 ; v1(103.514,63.222) 103.538,63.246 105.791,63.246 107.569,61.468 ; RL1.5@114.681,69.723 109.601,69.723 107.569,67.691 ; RL2.5 109.347,86.868 107.569,85.09 ; RL3.5 109.855,104.14 107.569,101.854 ; RL4.5 110.236,121.412 107.569,118.745 107.569,111.76 ; v1(122.936,40.767) 122.936,42.545 ; 122.936,43.942 122.936,42.545 ; 123.063,43.942 123.063,52.324 121.158,54.229 109.855,54.229 107.569,56.515 107.569,61.468 ; 140.9,42.545 122.936,42.545 ; 107.569,61.468 107.569,67.691 ; 107.569,67.691 107.569,85.09 ; 107.569,85.09 107.569,101.854 ; 107.569,101.854 107.569,111.76
BBB: MD1.30 U6.1@84.678,97.536 | length 35.9
  Top Layer w0.6: MD1.30 53.841,91.941 59.436,97.536 U6.1@84.678,97.536
BEEP: R47.1 U6.16@90.328,97.536 | length 4.2
  Top Layer w0.6: U6.16@90.328,97.536 92.329,97.536 92.771,97.978 R47.1
BOOT: JP1.1 MD1.25 | length 42.8
  Top Layer w0.6: MD1.25 60.341,89.349 60.341,90.059 v2(61.341,91.059)
  Bottom Layer w0.6: JP1.1 38.261,106.587 38.261,107.603 38.989,108.331 58.547,108.331 61.341,105.537 v2(61.341,91.059)
COM1: OUT1.2 RL1.1 | length 29.4
  Bottom Layer w3: RL1.1 131.901,63.5 134.441,66.04 OUT1.2
COM2: OUT2.2 RL2.1 | length 29.6
  Bottom Layer w3: RL2.1 131.52,80.772 134.314,83.566 140.646,83.566 OUT2.2
COM3: OUT3.2 RL3.1 | length 29.4
  Bottom Layer w3: RL3.1 131.901,98.044 134.441,100.584 OUT3.2
COM4: OUT4.2 RL4.1 | length 29.4
  Bottom Layer w3: RL4.1 131.901,115.316 134.441,117.856 OUT4.2
COMP: C27.1 U1.3 | length 3.5
  Top Layer w0.6: C27.1 88.519,61.976 89.154,62.611 U1.3
EOLINE: MD1.11 R43.1 | length 25.6
  Top Layer w0.4: MD1.11 56.388,72.192 56.388,68.961 59.182,66.167 59.182,55.753 60.741,54.194 66.075,54.194 R43.1
FB: R59.2 R60.1 U1.4 | length 13.8
  Top Layer w0.6: U1.4 90.513,61.336 89.488,61.336 89.154,61.002 89.154,59.162 89.642,58.674 93.091,58.674 93.916,57.848 93.916,55.626 ; R60.1 93.916,55.626 ; R59.2 93.916,55.626
GND: "12V - OUT.2" "12V IN.2" "LINE 1.2" "LINE 2.2" "LINE 3.2" "LINE 4.2" "LINE 5.2" "LINE 6.2" "LINE 7.2" "LINE 8.2" C1.2 C2.2 C3.2 C4.2 C6.2 C7.2 C8.2 C9.2 C10.2 C11.2 C12.2 C13.2 C14.2 C15.2 C16.2 C17.2 C18.2 C19.2 C22.2 C23.2 C24.2 C26.2 D1.1 JP1.2 MD1.1 MD1.15 MD1.38 MD1.39 R7.1 R11.1 R15.1 R19.1 R23.1 R28.1 R32.1 R36.1 R41.2 R57.2 R58.2 R60.2 R68.2 U1.5 U1.9 U3.4 U6.6@52.282,62.357 U6.7@52.282,63.627 U6.8 U6.9@90.328,88.646 | length 618
  Top Layer w0.5: C16.2 C17.2 38.533,60.146 40.207,60.146 v1(40.259,60.198) ; JP1.2 40.093,103.759 40.386,103.466 40.386,95.123 43.681,91.828 MD1.38 43.681,83.319 45.466,81.534 49.346,81.534 51.181,81.534 53.016,81.534 53.016,79.699 MD1.39@53.016,77.864 ; v1(42.418,70.358) 43.547,70.358 43.681,70.224 ; C1.2 C2.2 43.307,68.846 43.307,69.85 43.681,70.224 ; C6.2 43.601,46.847 45.143,46.847 ; MD1.1 43.681,70.224 ; v2(45.085,47.879) 45.143,47.821 45.143,46.847 ; R7.1 46.684,46.847 45.143,46.847 ; MD1.39@51.181,79.699 49.346,79.699 49.346,77.864 51.181,77.864 MD1.39@53.016,77.864 ; U6.6@52.282,62.357 52.307,62.382 53.365,62.382 53.848,62.865 53.848,63.627 ; U6.7@52.282,63.627 53.848,63.627 ; U6.8@52.282,64.897 53.555,64.897 53.848,64.604 53.848,63.627 ; C7.2 53.81,46.843 55.329,46.843 ; C3.2 v1(54.229,105.029) ; 55.099,63.901 54.825,63.627 53.848,63.627 ; v2(55.245,48.006) 55.245,46.927 55.329,46.843 ; R11.1 56.848,46.843 55.329,46.843 ; v1(63.373,75.057) 63.337,75.021 61.228,75.021 MD1.15 54.937,74.984 54.864,75.057 54.737,75.057 53.086,76.708 53.086,77.794 MD1.39@53.016,77.864 ; C8.2 63.97,46.843 65.489,46.843 ; U3.4 v1(64.77,66.167) ; v1(65.024,70.358) 65.026,70.356 66.418,70.356 R41.2 ; v2(65.405,48.006) 65.489,47.922 65.489,46.843 ; R15.1 67.008,46.843 65.489,46.843 ; v1(72.009,61.849) 73.354,61.849 73.418,61.912 ; C19.2 73.418,60.718 73.418,61.912 ; C18.2 73.418,63.107 73.418,61.912 ; C4.2 76.415,102.132 76.708,101.839 v1(76.708,99.568) ; C9.2 74.097,46.863 75.438,46.863 ; v2(75.438,48.133) 75.438,46.863 ; R19.1 77.126,46.863 75.438,46.863 ; C10.2 84.174,46.947 84.399,46.722 85.471,46.722 ; U6.8@84.678,88.646 U6.8@84.828,88.646 ; v2(85.471,48.133) 85.471,46.722 ; R23.1 85.471,46.722 ; U6.9@90.178,88.646 U6.9@90.328,88.646 ; C11.2 94.334,46.952 94.559,46.727 95.631,46.727 ; v2(95.631,48.133) 95.631,46.727 ; R28.1 95.631,46.727 ; C12.2 104.633,46.952 104.858,46.727 106.045,46.727 ; v2(106.045,48.006) 106.045,46.727 ; R32.1 106.045,46.727 ; C13.2 114.656,46.959 114.881,46.734 116.078,46.734 ; v2(116.078,48.133) 116.078,46.734 ; R36.1 116.078,46.734 ; 120.777,36.195 120.814,36.158 C23.2 C22.2 ; 120.777,42.418 120.904,42.291 C14.2 C15.2
  Top Layer w0.6: U1.5 97.409,61.341 99.055,59.695
  Top Layer w1: v1(79.629,88.646) U6.8@84.678,88.646 ; v1(81.026,67.31) 84.519,67.31 ; D1.1 84.519,67.31 ; U6.8@84.828,88.646 U6.9@90.178,88.646 ; R60.2 90.556,55.715 90.456,55.815 R68.2 87.088,55.915 85.681,55.915 85.095,56.5 R57.2 85.095,66.162 84.519,66.738 84.519,67.31 ; U1.9 93.472,62.992 93.472,60.452 94.229,59.695 99.055,59.695 ; v1(99.441,57.658) 99.441,59.309 99.055,59.695 ; C26.2 C24.2 103.278,59.817 103.156,59.695 R58.2 99.055,59.695 ; v2(120.777,33.655) 120.777,36.195 120.777,42.418 v2(120.777,45.847) ; 140.9,37.338 144.321,37.338 144.907,37.924 144.907,46.912 144.321,47.498 141.027,47.498 140.9,47.625
  Bottom Layer w0.5: v2@45.123,47.917 45.123,50.165 46.228,51.27 46.228,51.435 ; v1(55.118,64.389) 55.204,64.475 55.204,64.793 55.245,64.834 55.245,65.786 59.69,70.231 63.373,70.231 63.873,70.231 63.914,70.272 64.938,70.272 v1(65.024,70.358) ; v2(55.245,48.006) 55.245,50.038 56.642,51.435 ; v2(65.405,48.006) 65.405,50.038 66.802,51.435 66.929,51.435 ; v1(72.009,61.849) 76.415,61.849 76.708,61.556 ; v2(75.438,48.133) 75.438,50.038 76.835,51.435 76.708,51.562 ; 76.708,88.646 76.962,88.646 ; v2(85.471,48.133) 85.471,50.165 86.741,51.435 ; v2(95.631,48.133) 95.631,49.784 97.028,51.181 97.028,51.435 ; v2(106.045,48.006) 106.045,50.165 107.315,51.435 ; v2(116.078,48.133) 116.078,50.038 117.475,51.435 117.602,51.435
  Bottom Layer w1: JP1.2 50.546,103.759 51.816,105.029 v1(54.229,105.029) ; v1(40.259,60.198) 39.624,60.198 39.497,60.325 ; v1(42.418,70.358) 40.354,70.358 39.497,69.501 39.497,60.325 ; v2(45.085,47.879) v2@45.123,47.917 ; 46.355,31.242 46.355,28.145 46.941,27.559 56.261,27.559 ; 56.515,31.242 56.515,27.813 56.261,27.559 ; v1(63.373,75.057) 63.373,70.231 63.373,67.564 v1(64.77,66.167) ; 63.627,73.787 76.581,73.787 76.708,73.66 ; 66.675,31.242 66.675,27.686 66.548,27.559 ; 66.802,51.435 56.642,51.435 46.228,51.435 40.767,51.435 39.497,52.705 39.497,60.325 ; 66.929,51.435 76.835,51.435 86.741,51.435 97.028,51.435 107.315,51.435 117.475,51.435 ; 76.708,51.562 76.708,61.556 76.708,67.437 ; v1(76.708,99.568) 76.708,88.646 76.708,73.66 ; 76.835,31.242 76.835,28.067 76.327,27.559 ; 76.962,88.646 v1(79.629,88.646) ; v1(81.026,67.31) 80.899,67.437 76.708,67.437 ; 86.995,31.242 86.995,27.559 ; 97.155,31.242 97.155,27.559 ; v1(99.441,57.658) 99.441,51.562 99.568,51.435 ; 107.315,31.242 107.315,27.559 ; 117.475,31.242 117.475,27.559 ; 117.602,51.435 119.126,51.435 120.777,49.784 v2(120.777,45.847) ; v2(120.777,33.655) 120.777,27.559 ; 140.9,37.338 134.063,37.338 133.477,36.752 133.477,29.464 131.572,27.559 120.777,27.559 ; 56.261,27.559 66.548,27.559 ; 66.548,27.559 76.327,27.559 ; 76.327,27.559 86.995,27.559 ; 76.708,67.437 76.708,73.66 ; 86.995,27.559 97.155,27.559 ; 97.155,27.559 107.315,27.559 ; 107.315,27.559 117.475,27.559 ; 117.475,27.559 120.777,27.559
IN1: R8.2 U6.12@47.032,61.087 | length 19.5
  Top Layer w0.4: R8.2 40.894,59.436 42.545,61.087 U6.12@47.032,61.087
IN2: R12.2 U6.13@47.032,59.817 | length 21.8
  Top Layer w0.4: U6.13@47.032,59.817 44.958,59.817 43.053,57.912 43.053,51.689 46.228,48.514 50.546,48.514 51.157,47.903 R12.2
IN3: R16.2 U6.14@47.032,58.547 | length 29
  Top Layer w0.4: U6.14@47.032,58.547 45.339,58.547 44.196,57.404 44.196,51.435 46.482,49.149 60.071,49.149 61.317,47.903 R16.2
IN4: R20.2 U6.15@47.032,57.277 | length 36.9
  Top Layer w0.4: U6.15@47.032,57.277 45.593,57.277 45.085,56.769 45.085,51.689 46.977,49.797 70.472,49.797 71.477,48.792 R20.2
IN5: R24.2 U6.5@52.282,61.087 | length 44.6
  Top Layer w0.4: U6.5@52.282,61.087 50.927,61.087 49.657,59.817 49.657,52.959 52.219,50.397 77.871,50.397 81.537,46.731 R24.2
IN6: R29.2 U6.4@52.282,59.817 | length 53.8
  Top Layer w0.4: U6.4@52.282,59.817 50.8,59.817 50.546,59.563 50.546,52.919 52.468,50.997 90.1,50.997 91.821,49.276 R29.2
IN7: R33.2 U6.2@52.282,57.277 | length 59.6
  Top Layer w0.4: U6.2@52.282,57.277 52.207,57.202 51.857,57.202 51.146,56.491 51.146,53.502 53.051,51.597 99.66,51.597 101.962,49.295 R33.2
IN8: R37.2 U6.1@52.282,56.007 | length 66.4
  Top Layer w0.4: U6.1@52.282,56.007 52.322,55.967 53.507,55.967 54.356,55.118 54.356,53.467 55.626,52.197 109.728,52.197 112.122,49.803 R37.2
INLINE: R46.1 U3.3 U3.6 | length 16.6
  Top Layer w0.4: R46.1 55.763,60.706 v1(56.896,60.706) ; v1(63.754,62.103) 66.04,62.103 ; U3.6 66.04,62.103 ; U3.3 66.04,62.103
  Bottom Layer w0.4: v1(56.896,60.706) 58.293,62.103 v1(63.754,62.103)
INSEN: MD1.12 R45.1 | length 14.6
  Top Layer w0.4: MD1.12 57.651,70.619 57.913,70.357 58.039,70.231 63.119,70.231 64.643,71.755 68.326,71.755 68.707,71.374 R45.1
LED_GREEN: MD1.33 R1.1 | length 43
  Top Layer w0.4: MD1.33 50.031,93.225 47.244,96.012 47.244,111.887 48.768,113.411 61.869,113.411 62.611,114.153 62.611,116.918 R1.1
LED_RED: MD1.36 R2.1 | length 31.5
  Top Layer w0.4: MD1.36 46.221,112.515 50.673,116.967 R2.1
LED_WIFI: MD1.37 R3.1 | length 28.6
  Top Layer w0.4: R3.1 42.975,114.251 44.951,112.275 MD1.37
LINE1: "LINE 1.1" R6.2 R38.1 R48.2 | length 12.3
  Top Layer w0.3: R48.2 41.021,37.973 R6.2 41.026,40.518 R38.1
  Top Layer w0.4: R48.2 41.275,37.465 41.275,31.242
LINE2: "LINE 2.1" R9.1 R10.2 R49.2 | length 12.4
  Top Layer w0.4: 51.435,31.242 51.435,37.465 R49.2 51.054,40.386 R10.2 51.186,40.518 R9.1
LINE3: "LINE 3.1" R13.1 R14.2 R50.2 | length 6.1
  Top Layer w0.4: R50.2@61.595,37.465 R50.2 61.323,37.955 R14.2 R13.1
LINE4: "LINE 4.1" R17.1 R18.2 R51.2 | length 12.3
  Top Layer w0.4: 71.755,31.242 71.755,37.465 R51.2 71.501,37.973 R18.2 R17.1
LINE5: "LINE 5.1" R21.1 R22.2 R52.2 | length 12.5
  Top Layer w0.4: 81.915,31.242 81.915,37.465 R52.2 81.6,37.912 R22.2 81.662,40.513 R21.1
LINE6: "LINE 6.1" R26.1 R27.2 R53.2 | length 12.4
  Top Layer w0.4: 92.075,31.242 92.075,37.465 R53.2 91.803,37.955 R27.2 91.808,40.513 R26.1
LINE7: "LINE 7.1" R30.1 R31.2 R54.2 | length 12.5
  Top Layer w0.4: 102.235,31.242 102.235,37.47 R54.2 101.968,37.955 R31.2 101.977,40.513 R30.1
LINE8: "LINE 8.1" R34.1 R35.2 R55.2 | length 12.4
  Top Layer w0.4: 112.395,31.242 112.395,37.47 R55.2 112.019,40.391 R35.2 R34.1
NetBEEP_2: BEEP.2 R47.2 | length 5.8
  Top Layer w0.6: BEEP.2 92.771,104.988 R47.2
  Bottom Layer w0.6: BEEP.2@91.313,106.27 BEEP.2
NetC3_1: C3.1 SW1.1 | length 3.3
  Top Layer w0.4: SW1.1 51.001,102.235 C3.1
NetC4_1: C4.1 SW2.1 | length 4
  Top Layer w0.4: SW2.1 71.031,103.398 71.265,103.632 C4.1
NetC6_1: C6.1 R6.1 R7.2 R8.1 | length 9
  Top Layer w0.3: R6.1 41.021,44.709 R8.1 43.434,44.836 ; C6.1 43.434,45.419 43.434,44.836 ; R7.2 46.795,44.836 43.434,44.836
NetC7_1: C7.1 R10.1 R11.2 R12.1 | length 8.9
  Top Layer w0.4: R10.1 51.157,42.437 R12.1 53.594,44.836 ; C7.1 53.594,45.359 53.594,44.836 ; R11.2 56.955,44.836 53.594,44.836
NetC8_1: C8.1 R14.1 R15.2 R16.1 | length 8.9
  Top Layer w0.4: R14.1 61.317,42.418 R16.1 63.881,44.836 ; C8.1 63.881,45.432 63.881,44.836 ; R15.2 67.115,44.836 63.881,44.836
NetC9_1: C9.1 R18.1 R19.2 R20.1 | length 8.9
  Top Layer w0.4: R18.1 71.477,42.442 R20.1 73.914,44.831 ; C9.1 73.914,45.363 73.914,44.831 ; R19.2 77.258,44.831 73.914,44.831
NetC10_1: C10.1 R22.1 R23.2 R24.1 | length 8.8
  Top Layer w0.4: R22.1 81.637,42.512 R24.1 84.201,44.831 ; C10.1 84.201,45.427 84.201,44.831 ; R23.2 87.435,44.831 84.201,44.831
NetC11_1: C11.1 R27.1 R28.2 R29.1 | length 8.9
  Top Layer w0.4: R27.1 91.803,44.818 R29.1 94.234,44.836 ; C11.1 94.234,45.359 94.234,44.836 ; R28.2 97.595,44.836 94.234,44.836
NetC12_1: C12.1 R31.1 R32.2 R33.1 | length 8.9
  Top Layer w0.4: R31.1 101.962,42.41 R33.1 104.521,44.836 ; C12.1 104.521,45.347 104.521,44.836 ; R32.2 107.755,44.836 104.521,44.836
NetC13_1: C13.1 R35.1 R36.2 R37.1 | length 8.9
  Top Layer w0.4: R35.1 112.141,44.824 R37.1 114.681,44.843 ; C13.1 114.681,45.441 114.681,44.843 ; R36.2 117.915,44.843 114.681,44.843
NetC25_1: C25.1 U1.8 | length 7.3
  Top Layer w0.6: C25.1 94.234,67.564 97.36,67.564 97.536,67.388 97.536,65.327 97.36,65.151 U1.8
NetC25_2: C25.2 D1.2 L1.1 pad.2@84.074,74.549 U1.1 | length 21.1
  Top Layer w0.6: L1.1@86.617,78.105 86.617,74.546 88.519,72.644 D1.2 D1.2@88.604,70.104 ; U1.1 90.513,65.156 89.505,65.156 89.154,65.507 89.154,69.554 D1.2@88.604,70.104 ; C25.2 92.207,69.21 91.313,70.104 D1.2@88.604,70.104
  Top Layer w0.7: C25.2@92.474,67.275 C25.2@92.474,67.691
  other v1: 85.344,76.2 87.249,76.2 85.344,77.47 87.249,77.47 85.344,78.74 87.249,78.74 85.344,80.01 87.249,80.01
NetC27_2: C27.2 R68.1 | length 2.4
  Top Layer w0.6: R68.1 87.219,57.745 87.219,60.046 C27.2
NetLED1_2: LED1.2 R48.1 | length 4.1
  Top Layer w0.3: R48.1 LED1.2
NetLED2_2: LED2.2 R49.1 | length 4.1
  Top Layer w0.4: R49.1 LED2.2
NetLED3_2: LED3.2 R50.1 | length 4.1
  Top Layer w0.4: R50.1 LED3.2
NetLED4_2: LED4.2 R51.1 | length 4.1
  Top Layer w0.4: R51.1 LED4.2
NetLED5_2: LED5.2 R52.1 | length 4.1
  Top Layer w0.4: R52.1 LED5.2
NetLED6_2: LED6.2 R53.1 | length 4.1
  Top Layer w0.4: R53.1 LED6.2
NetLED7_2: LED7.2 R54.1 | length 4.1
  Top Layer w0.4: R54.1 LED7.2
NetLED8_2: LED8.2 R55.1 | length 4.1
  Top Layer w0.4: R55.1 LED8.2
NetLED_G_2: LED_G.2 R1.2 | length 2.7
  Top Layer w0.4: LED_G.2 64.516,117.011 R1.2
NetLED_R_2: LED_R.2 R2.2 | length 2.7
  Top Layer w0.4: LED_R.2 54.419,117.011 R2.2
NetLED_WF_2: LED_WF.2 R3.2 | length 2.7
  Top Layer w0.4: LED_WF.2 44.831,117.011 R3.2
NetR39_2: R39.2 R40.1 U3.5 | length 24.9
  Top Layer w0.4: R40.1 62.357,66.172 62.357,58.42 63.119,57.658 63.754,57.658 ; v1(63.373,56.261) 63.373,56.389 63.754,56.77 63.754,57.658 ; U3.5 64.77,57.892 64.536,57.658 63.754,57.658 ; v1(71.247,58.293) R39.2
  Bottom Layer w0.4: v1(63.373,56.261) 63.373,57.785 63.881,58.293 v1(71.247,58.293)
NetR40_2: R40.2 R41.1 U3.2 | length 8
  Top Layer w0.4: R40.2 66.167,68.199 R41.1 66.421,67.31 67.31,66.421 U3.2
NetR42_2: R42.2 R43.2 U3.7 | length 6.3
  Top Layer w0.4: U3.7 67.31,57.785 66.421,56.896 R43.2 R42.2
NetR44_2: R44.2 R45.2 U3.1 | length 9.1
  Top Layer w0.4: U3.1 68.58,67.183 ; R45.2 68.58,68.326 68.58,67.183 ; R44.2 72.776,66.949 72.542,67.183 68.58,67.183
NetR46_2: R46.2 U6.3@52.282,58.547 | length 3.3
  Top Layer w0.4: U6.3@52.282,58.547 55.504,58.547 R46.2
NetR56_2: R56.2 R57.1 U1.2 | length 26.2
  Top Layer w0.4: R57.1 R57.1@87.249,63.881
  Top Layer w0.6: R57.1 v1(86.995,66.04) ; R57.1@87.249,63.881 87.254,63.886 90.513,63.886 U1.2 ; R56.2 v1(103.378,68.58)
  Bottom Layer w0.6: v1(86.995,66.04) 86.995,68.229 87.346,68.58 v1(103.378,68.58)
NetR58_1: R58.1 U1.6 | length 5.7
  Top Layer w0.6: U1.6 100.36,62.611 100.711,62.26 100.711,61.722 R58.1
O1: MD1.29 U6.2@84.678,96.266 | length 34
  Top Layer w0.6: MD1.29 55.111,91.689 59.688,96.266 U6.2@84.678,96.266
O2: MD1.28 U6.3@84.678,94.996 | length 32.1
  Top Layer w0.6: MD1.28 56.381,91.56 59.817,94.996 U6.3@84.678,94.996
O3: MD1.27 U6.4@84.678,93.726 | length 30.2
  Top Layer w0.6: MD1.27 57.651,91.433 59.944,93.726 U6.4@84.678,93.726
O4: MD1.26 U6.5@84.678,92.456 | length 28.3
  Top Layer w0.6: MD1.26 58.921,91.306 60.071,92.456 U6.5@84.678,92.456
OUT1: OUT1.1 RL1.3 | length 15.1
  Bottom Layer w3: RL1.3 134.366,57.404 137.922,60.96 OUT1.1
OUT2: OUT2.1 RL2.3 | length 15.1
  Bottom Layer w3: RL2.3 137.344,74.676 OUT2.1
OUT3: OUT3.1 RL3.3 | length 15.1
  Bottom Layer w3: RL3.3 137.344,91.948 OUT3.1
OUT4: OUT4.1 RL4.3 | length 15.1
  Bottom Layer w3: RL4.3 137.344,109.22 OUT4.1
RL1: RL1.4 U6.12@90.328,92.456 | length 49.4
  Top Layer w0.6: U6.12@90.328,92.456 92.837,92.456 107.95,77.343 107.95,59.563 110.109,57.404 RL1.4
RL2: RL2.4 U6.13@90.328,93.726 | length 33.9
  Top Layer w0.6: U6.13@90.328,93.726 93.091,93.726 108.75,78.067 108.75,75.527 109.601,74.676 RL2.4
RL3: RL3.4 U6.14@90.328,94.996 | length 25.7
  Top Layer w0.6: U6.14@90.328,94.996 93.853,94.996 96.901,91.948 RL3.4
RL4: RL4.4 U6.15@90.328,96.266 | length 29.8
  Top Layer w0.6: U6.15@90.328,96.266 95.25,96.266 97.028,98.044 108.204,109.22 RL4.4
RST: MD1.3 R4.1 SW1.3 | length 54.6
  Top Layer w0.4: MD1.3 46.224,72.195 46.224,69.473 v1(46.228,69.469) ; SW1.3 53.939,106.771 R4.1 v1(56.261,106.807)
  Bottom Layer w0.4: v1(46.228,69.469) 54.864,69.469 55.499,70.104 55.519,70.104 56.261,70.846 v1(56.261,106.807)
RX0: JP1.3 MD1.34 | length 21.4
  Top Layer w0.4: MD1.34 48.764,89.203 48.764,92.198 v1(48.768,92.202)
  Bottom Layer w0.6: JP1.3 39.243,99.949 47.244,99.949 49.022,98.171 49.022,95.361 48.768,95.107 v1(48.768,92.202)
S0: MD1.10 U6.11@47.032,62.357 | length 14.3
  Top Layer w0.4: U6.11@47.032,62.357 48.895,62.357 50.8,64.262 50.8,65.486 55.111,69.797 MD1.10
S1: MD1.9 U6.10@47.032,63.627 | length 12.4
  Top Layer w0.4: U6.10@47.032,63.627 48.768,63.627 50.038,64.897 50.038,65.786 53.841,69.589 MD1.9
S2: MD1.8 U6.9@47.032,64.897 | length 10.2
  Top Layer w0.4: U6.9@47.032,64.897 47.107,64.972 48.208,64.972 52.571,69.335 MD1.8
TX0: JP1.4 MD1.35 | length 17.1
  Top Layer w0.4: MD1.35 47.494,89.203 47.494,91.436 v1(47.498,91.44)
  Bottom Layer w0.6: JP1.4 44.323,98.679 47.498,95.504 v1(47.498,91.44)
Wf_CONFIG: MD1.31 R5.1 SW2.3 | length 33.6
  Top Layer w0.4: MD1.31 52.571,92.195 59.182,98.806 65.786,98.806 67.564,100.584 67.564,105.664 68.671,106.771 SW2.3 71.067,106.807 R5.1
pads on no net: MD1.4 MD1.5 MD1.6 MD1.7 MD1.13 MD1.14 MD1.16 MD1.17 MD1.18 MD1.19 MD1.20 MD1.21 MD1.22 MD1.23 MD1.24 MD1.32 RL1.2 RL2.2 RL3.2 RL4.2 SW1.2 SW1.4 SW2.2 SW2.4 U6.6@84.678,91.186 U6.7@84.678,89.916 U6.10@90.328,89.916 U6.11@90.328,91.186
copper on no net: | length 63.9
  Top Layer w1: 40.894,31.623 40.894,37.846 ; 51.244,30.797 51.244,35.433 51.244,37.655 ; 61.214,31.623 61.214,37.846 ; 61.595,31.242 61.595,32.163 ; 71.374,30.988 71.374,37.846 ; 81.6,31.557 81.6,37.912 ; 86.614,75.946 86.614,74.549 88.519,72.644 88.519,69.723 89.154,69.088 89.154,65.507 89.33,65.332 ; 91.694,31.623 91.694,37.846 ; 101.859,31.618 101.859,37.846 ; 112.207,31.43 112.207,37.658
  other v1: 43.561,102.235 63.5,102.235 42.164,106.807 63.5,106.807

## Silkscreen, mask and mechanical layers (free items; w line width, h text height)
Top Overlay:
  lines w0.254: 38.735,36.322 38.735,48.006 48.895,48.006 ; 59.055,36.322 59.055,48.006 48.895,48.006 ; 59.077,36.338 59.077,48.022 69.237,48.022 69.237,36.338 ; 69.215,36.322 69.215,48.006 79.375,48.006 ; 120.015,36.322 120.015,48.006 109.855,48.006 ; 48.895,48.006 48.895,36.322 48.895,48.006 ; 79.375,48.006 79.375,36.322 79.375,48.006 ; 79.375,48.006 89.535,48.006 ; 89.535,48.006 89.535,36.322 89.535,48.006 ; 89.535,48.006 99.695,48.006 ; 99.695,48.006 109.855,48.006 ; 99.695,48.006 99.695,36.322 99.695,48.006 ; 109.855,48.006 109.855,36.322 109.855,48.006
  text "FIRE ALARM" at 79.629,122.428 h1.52
  text "HAUI-2023" at 79.375,119.507 h1.52
  text "0V" at 45.847,27.436 h0.5
  text "0V" at 66.421,27.432 h0.5
  text "0V" at 76.454,27.432 h0.5
  text "0V" at 86.614,27.432 h0.5
  text "0V" at 96.901,27.432 h0.5
  text "0V" at 107.061,27.436 h0.5
  text "0V" at 117.221,27.436 h0.5
  text "0V" at 56.261,27.305 h0.5
Bottom Overlay:
  lines w0.4: 38.735,48.514 38.735,49.149 121.031,49.149 121.031,27.813 38.735,27.813 38.735,48.768
Mechanical 1:
  lines w0.254: 33.401,25.222 33.401,125.222 ; 33.477,25.273 150.622,25.273 150.622,125.222 33.477,125.222